# Altium PCB LGA Interposer.PcbDoc
Units mil, origin at the board's own origin, x right, y up, seen from the top; angles counter-clockwise.
Board outline 6000 x 4000 mil, 6 copper layers (Top Layer 2, Top Layer 1, Top Layer, Bottom Layer, Bottom Layer 1, Bottom Layer 2), stack 53.135 mil thick; 51 components, 307 nets, 840 pads, 0 vias.
Unrouted connection lines stored in the file: 505.
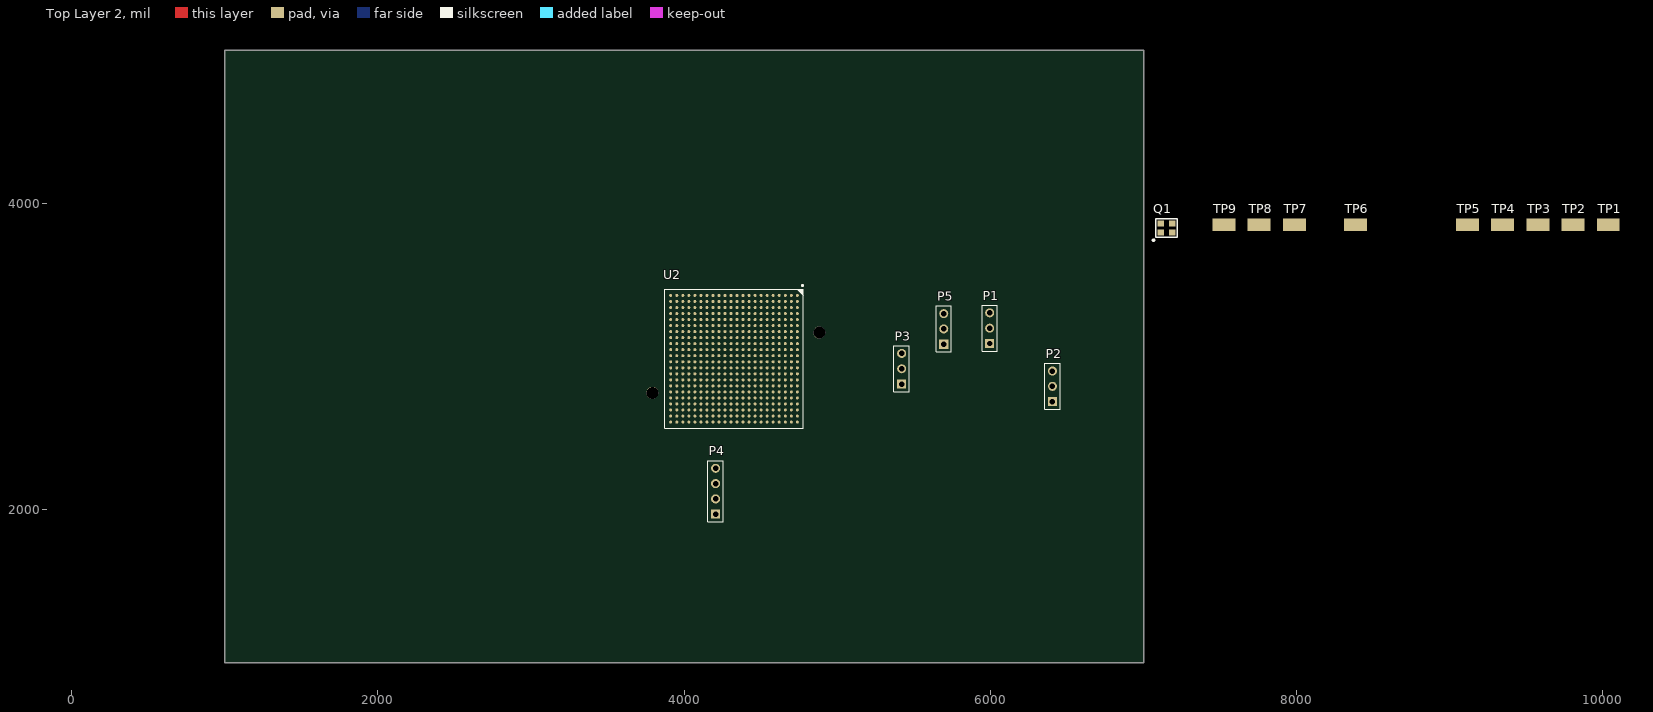
[diagram p0: Top Layer 2 view]
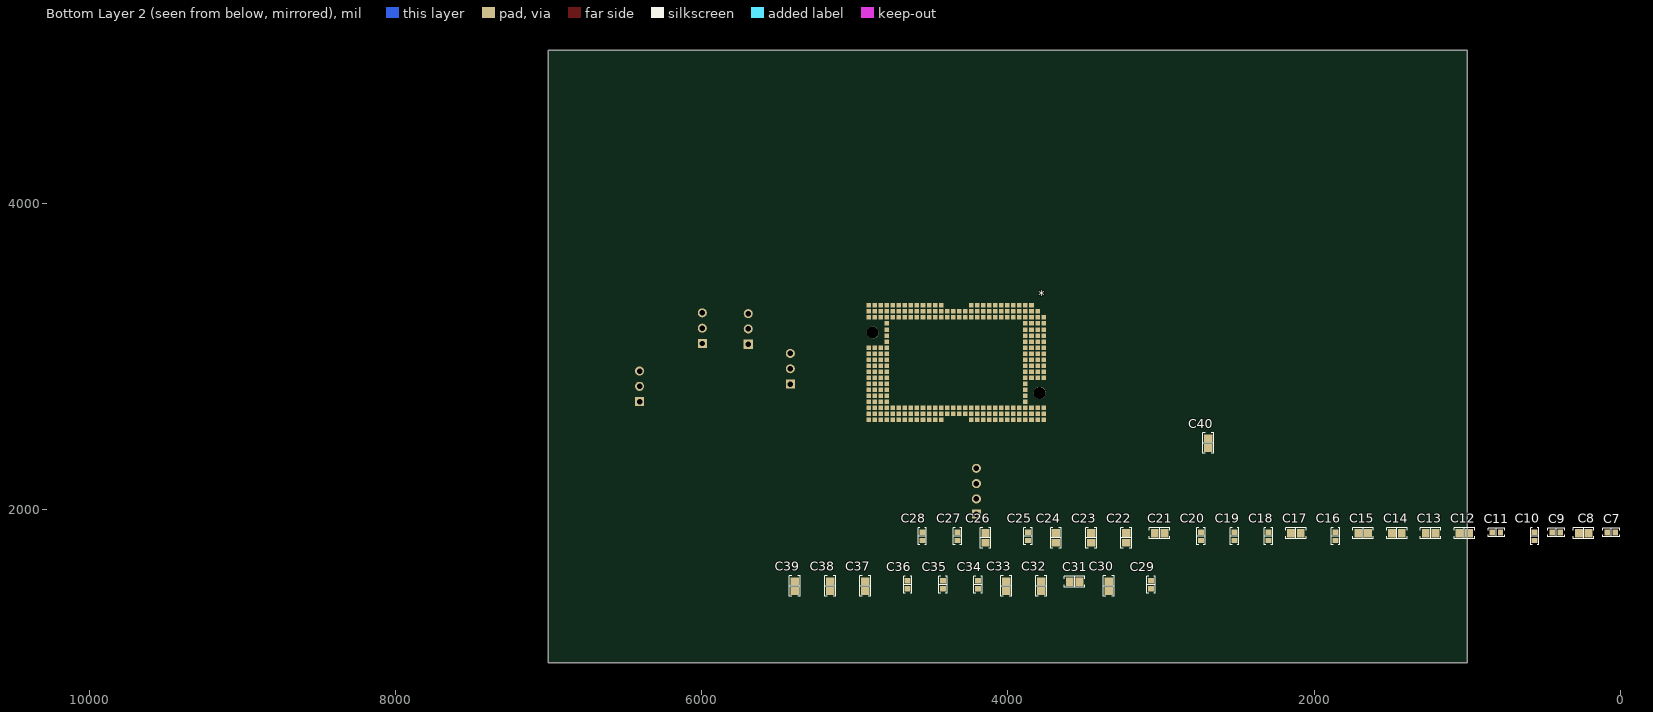
[diagram p1: Bottom Layer 2 view, seen from below]
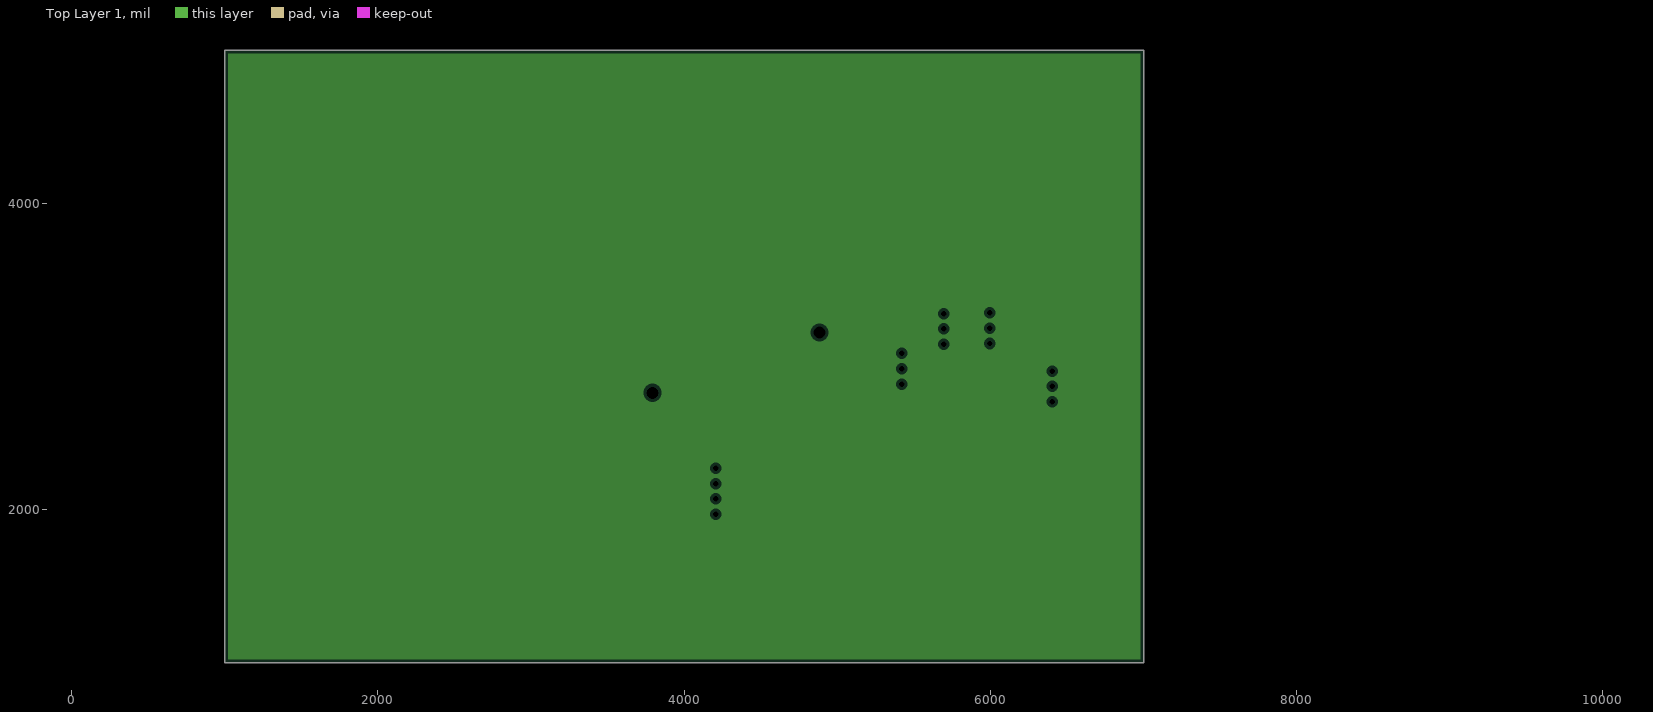
[diagram p2: Top Layer 1, clearances drawn from the general rule]
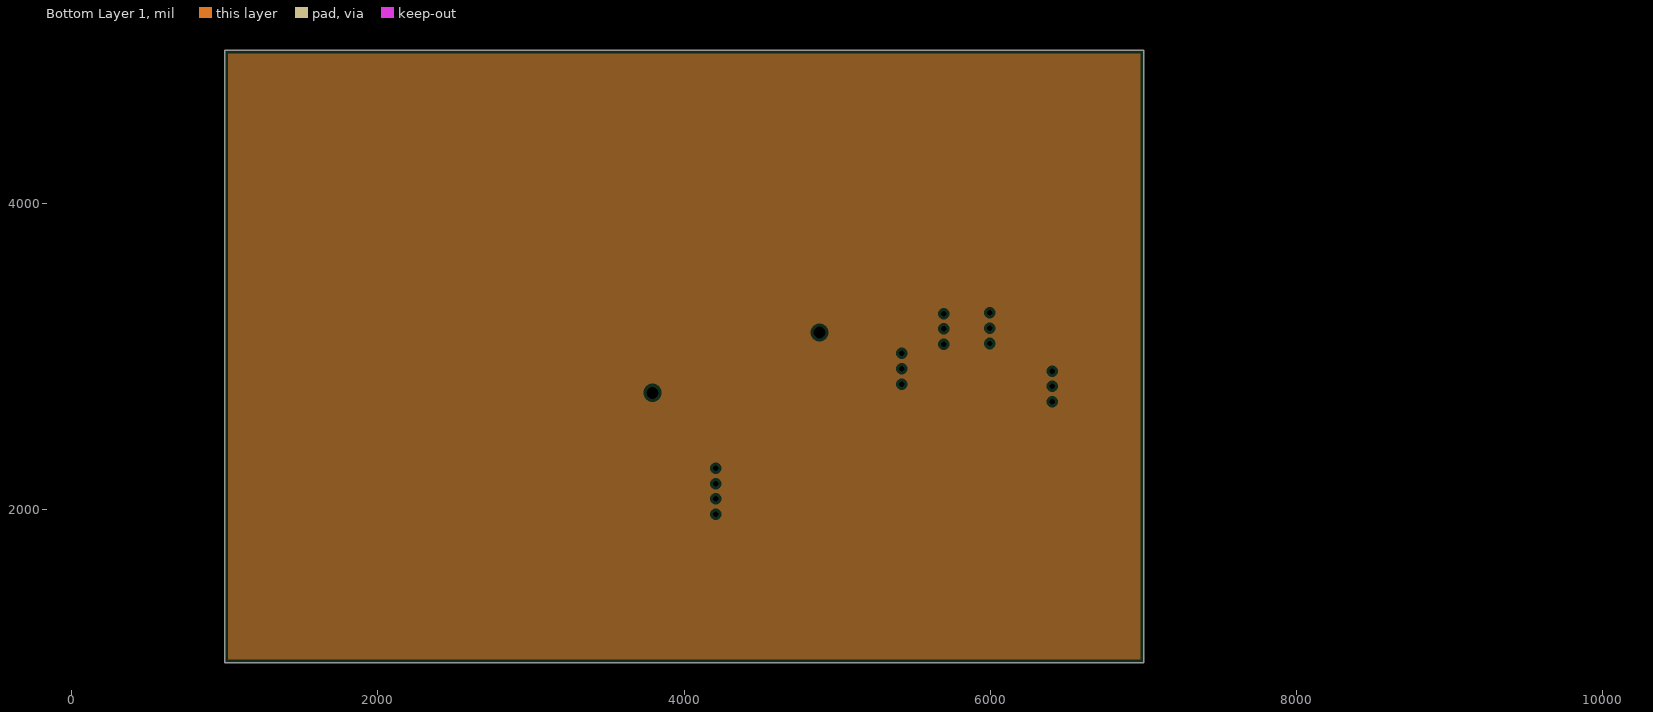
[diagram p3: Bottom Layer 1, clearances drawn from the general rule]

## Layer stack, top to bottom
Top Solder: solder mask 0.4, Solder Resist, Dk 3.5
Top Layer 2: signal copper 1.378
Dielectric 4: prepreg 3.9134, PP-006, Dk 4.1
Top Layer 1: plane copper 0.5984
Dielectric 2: core 13.7795, PP-006, Dk 4.1
Top Layer: signal copper 0.5984
Dielectric 1: dielectric 12.6, FR-4, Dk 4.8
Bottom Layer: signal copper 0.5984
Dielectric 3: core 13.7795, PP-006, Dk 4.1
Bottom Layer 1: plane copper 0.5984
Dielectric 5: prepreg 3.9134, PP-006, Dk 4.1
Bottom Layer 2: signal copper 1.378
Bottom Solder: solder mask 0.4, Solder Resist, Dk 3.5

## Board outline
1000,1000 7000,1000 7000,5000 1000,5000

## Design rules (kind name [scope] priority, off if disabled: settings)
Clearance [All] p1: gap=6 ignorepadtopadclearanceinfootprint=FALSE
DiffPairsRouting [All] p1: maxlimit=10 minlimit=10 mostfreqgap=10 toplayer_minwidth=15 toplayer_maxwidth=15 toplayer_prefwidth=15 midlayer1_minwidth=15 midlayer1_maxwidth=15 midlayer1_prefwidth=15 midlayer2_minwidth=15 midlayer2_maxwidth=15 midlayer2_prefwidth=15 bottomlayer_minwidth=15 bottomlayer_maxwidth=15 bottomlayer_prefwidth=15 maxuncoupledlength=500
PlaneClearance [All] p1: clearance=20
PlaneConnect [All] p1: planeconnectstyle=Relief reliefexpansion=20 reliefentries=4 reliefconductorwidth=10 reliefairgap=10
PolygonConnect [All] p1: connectstyle=Relief reliefconductorwidth=10 reliefentries=4 polygonreliefangle="90 Angle" airgapwidth=10
RoutingVias [All] p1: holewidth=28 width=50 viastyle="Through Hole" minholewidth=28 minwidth=50 maxholewidth=28 maxwidth=50
SolderMaskExpansion [All] p1: expansion=4 istentingtop=FALSE
Width [All] p1: maxlimit=10 minlimit=10 preferedwidth=10
27 further rules are at their usual default settings.

## Classes and differential pairs
net class GPIO[0..118]: GPIO0 GPIO1 GPIO2 GPIO3 GPIO4 GPIO5 GPIO6 GPIO7 GPIO8 GPIO9 GPIO10 GPIO11 GPIO12 GPIO13 GPIO14 GPIO15 GPIO16 GPIO17 GPIO18 GPIO19 GPIO20 GPIO21 GPIO22 GPIO23 GPIO24 GPIO25 GPIO26 GPIO27 GPIO28 GPIO29 GPIO30 GPIO31 GPIO32 GPIO33 GPIO34 GPIO35 GPIO36 GPIO37 GPIO38 GPIO39 GPIO40 GPIO41 GPIO42 GPIO43 GPIO44 GPIO45 GPIO46 GPIO47 GPIO48 GPIO49 GPIO50 GPIO51 GPIO52 GPIO53 GPIO54 GPIO55 GPIO56 GPIO57 GPIO58 GPIO59 GPIO60 GPIO61 GPIO62 GPIO63 GPIO64 GPIO65 GPIO66 GPIO67 GPIO68 GPIO69 GPIO70 GPIO71 GPIO72 GPIO73 GPIO74 GPIO75 GPIO76 GPIO77 GPIO78 GPIO79 GPIO80 GPIO81 GPIO82 GPIO83 GPIO84 GPIO85 GPIO86 GPIO87 GPIO88 GPIO89 GPIO90 GPIO91 GPIO92 GPIO93 GPIO94 GPIO95 GPIO96 GPIO97 GPIO98 GPIO99 GPIO100 GPIO101 GPIO102 GPIO103 GPIO104 GPIO105 GPIO106 GPIO107 GPIO108 GPIO109 GPIO110 GPIO111 GPIO112 GPIO113 GPIO114 GPIO115 GPIO116 GPIO117 GPIO118
net class EIO[0..35]: EIO0 EIO1 EIO2 EIO3 EIO4 EIO5 EIO6 EIO7 EIO8 EIO9 EIO10 EIO11 EIO12 EIO13 EIO14 EIO15 EIO16 EIO17 EIO18 EIO19 EIO20 EIO21 EIO22 EIO23 EIO24 EIO25 EIO26 EIO27 EIO28 EIO29 EIO30 EIO31 EIO32 EIO33 EIO34 EIO35
net class DQ[63..0]: DQ0 DQ1 DQ2 DQ3 DQ4 DQ5 DQ6 DQ7 DQ8 DQ9 DQ10 DQ11 DQ12 DQ13 DQ14 DQ15 DQ16 DQ17 DQ18 DQ19 DQ20 DQ21 DQ22 DQ23 DQ24 DQ25 DQ26 DQ27 DQ28 DQ29 DQ30 DQ31 DQ32 DQ33 DQ34 DQ35 DQ36 DQ37 DQ38 DQ39 DQ40 DQ41 DQ42 DQ43 DQ44 DQ45 DQ46 DQ47 DQ48 DQ49 DQ50 DQ51 DQ52 DQ53 DQ54 DQ55 DQ56 DQ57 DQ58 DQ59 DQ60 DQ61 DQ62 DQ63
net class DG_7: DQ56 DQ57 DQ58 DQ59 DQ60 DQ61 DQ62 DQ63 DQS7_N DQS7_P
net class DG_6: DQ48 DQ49 DQ50 DQ51 DQ52 DQ53 DQ54 DQ55 DQS6_N DQS6_P
net class DG_5: DQ40 DQ41 DQ42 DQ43 DQ44 DQ45 DQ46 DQ47 DQS5_N DQS5_P
net class DG_4: DQ32 DQ33 DQ34 DQ35 DQ36 DQ37 DQ38 DQ39 DQS4_N DQS4_P
net class DG_3: DQ24 DQ25 DQ26 DQ27 DQ28 DQ29 DQ30 DQ31 DQS3_N DQS3_P
net class DG_2: DQ16 DQ17 DQ18 DQ19 DQ20 DQ21 DQ22 DQ23 DQS2_N DQS2_P
net class DG_1: DQ8 DQ9 DQ10 DQ11 DQ12 DQ13 DQ14 DQ15 DQS1_N DQS1_P
net class DG_0: DQ0 DQ1 DQ2 DQ3 DQ4 DQ5 DQ6 DQ7 DQS0_N DQS0_P
net class CG: A0 A1 A2 A3 A4 A5 A6 A7 A8 A9 A10 A11 A12 A13 A14 A15
net class BA[2..0]: BA0 BA1 BA2
net class A[15..0]: A0 A1 A2 A3 A4 A5 A6 A7 A8 A9 A10 A11 A12 A13 A14 A15
component class Top: P1 P2 P3 P4 P5 Q1 TP1 TP2 TP3 TP4 TP5 TP6 TP7 TP8 TP9
component class "LGA Interposer": *
component class "A200T FPGA": C7 C8 C9 C10 C11 C12 C13 C14 C15 C16 C17 C18 C19 C20 C21 C22 C23 C24 C25 C26 C27 C28 C29 C30 C31 C32 C33 C34 C35 C36 C37 C38 C39 C40 U2
differential pair DQS7: +DQS7_P -DQS7_N
differential pair DQS6: +DQS6_P -DQS6_N
differential pair DQS5: +DQS5_P -DQS5_N
differential pair DQS4: +DQS4_P -DQS4_N
differential pair DQS3: +DQS3_P -DQS3_N
differential pair DQS2: +DQS2_P -DQS2_N
differential pair DQS1: +DQS1_P -DQS1_N
differential pair DQS0: +DQS0_P -DQS0_N
differential pair CK0: +CK0_P -CK0_N

## Components (designator, comment, footprint, x,y, rotation, side; value= is the part's Value field where it differs from the comment)
* "2319757-1  Socket" "2319757-1  LGA Socket" 3766.34,3333.74 r0 bottom
C7 "0.47µF" "CAP 0603_1608" 58.5,1850 r180 bottom
C8 "47µF" "CAP 0805_2012" 238.5,1845 r180 bottom
C9 "0.47µF" "CAP 0603_1608" 418.5,1850 r180 bottom
C10 "0.47µF" "CAP 0603_1608" 558.5,1825 r90 bottom
C11 "0.47µF" "CAP 0603_1608" 808.5,1850 r180 bottom
C12 "47µF" "CAP 0805_2012" 1018.5,1845 r180 bottom
C13 "47µF" "CAP 0805_2012" 1238.5,1845 r180 bottom
C14 "47µF" "CAP 0805_2012" 1458.5,1845 r180 bottom
C15 "47µF" "CAP 0805_2012" 1678.5,1845 r180 bottom
C16 "0.47µF" "CAP 0603_1608" 1858.5,1825 r90 bottom
C17 "47µF" "CAP 0805_2012" 2118.5,1845 r180 bottom
C18 "0.47µF" "CAP 0603_1608" 2298.5,1825 r90 bottom
C19 "0.47µF" "CAP 0603_1608" 2518.5,1825 r90 bottom
C20 "0.47µF" "CAP 0603_1608" 2738.5,1825 r90 bottom
C21 "47µF" "CAP 0805_2012" 3008.5,1845 r180 bottom
C22 "47µF" "CAP 0805_2012" 3225.35,1815 r90 bottom
C23 "47µF" "CAP 0805_2012" 3455.35,1815 r90 bottom
C24 "47µF" "CAP 0805_2012" 3685.35,1815 r90 bottom
C25 "0.47µF" "CAP 0603_1608" 3868.5,1825 r90 bottom
C26 "47µF" "CAP 0805_2012" 4145.35,1815 r90 bottom
C27 "0.47µF" "CAP 0603_1608" 4328.5,1825 r90 bottom
C28 "0.47µF" "CAP 0603_1608" 4558.5,1825 r90 bottom
C29 "0.47µF" "CAP 0603_1608" 3063.5,1510 r90 bottom
C30 "47µF" "CAP 0805_2012" 3340.35,1500 r90 bottom
C31 "47µF" "CAP 0805_2012" 3563.5,1530 r180 bottom
C32 "47µF" "CAP 0805_2012" 3780.35,1500 r90 bottom
C33 "47µF" "CAP 0805_2012" 4010.35,1500 r90 bottom
C34 "0.47µF" "CAP 0603_1608" 4193.5,1510 r90 bottom
C35 "0.47µF" "CAP 0603_1608" 4423.5,1510 r90 bottom
C36 "0.47µF" "CAP 0603_1608" 4653.5,1510 r90 bottom
C37 "47µF" "CAP 0805_2012" 4930.35,1500 r90 bottom
C38 "47µF" "CAP 0805_2012" 5160.35,1500 r90 bottom
C39 "47µF" "CAP 0805_2012" 5390.35,1500 r90 bottom
C40 "47µF" "CAP 0805_2012" 2690,2433.5 r90 bottom
P1 "Header 3" HDR1X3 5995,3085 r90 top
P2 "Header 3" HDR1X3 6405,2705 r90 top
P3 "Header 3" HDR1X3 5420,2820 r90 top
P4 "Header 4" HDR1X4 4205,1970 r90 top
P5 "Header 3" HDR1X3 5695,3080 r90 top
Q1 "SiT8008 Oscillator" "SiT8008 2.5x2" 7150,3840 r0 top
TP1 "5019" KSTN-5019_V 10035,3860 r0 top
TP2 "5019" KSTN-5019_V 9805,3860 r0 top
TP3 "5019" KSTN-5019_V 9575,3860 r0 top
TP4 "5019" KSTN-5019_V 9345,3860 r0 top
TP5 "5019" KSTN-5019_V 9115,3860 r0 top
TP6 "5019" KSTN-5019_V 8385,3860 r0 top
TP7 "5019" KSTN-5019_V 7985,3860 r0 top
TP8 "5019" KSTN-5019_V 7755,3860 r0 top
TP9 "5019" KSTN-5019_V 7525,3860 r0 top
U2 "XC7A200T-2FBG484I" FBG484 4325.31,2985.32 r270 top

## Footprints (in the part's own frame and the unit in brackets; to place one, negate y for a bottom-side part, rotate by r counter-clockwise, add the part's x,y. Pads: shape width x height; smd on the part's side, far side on the other; paste and mask are expansions set on the pad)
"2319757-1  LGA Socket" [mm]
  rect 0.75x0.75 smd: 1(2,0) 2(3,0) 3(4,0) 4(5,0) 5(6,0) 6(7,0) 7(8,0) 8(9,0) 9(10,0) 10(11,0) 11(12,0) 12(17,0) 13(18,0) 14(19,0) 15(20,0) 16(21,0) 17(22,0) 18(23,0) 19(24,0) 20(25,0) 21(26,0) 22(27,0) 23(28,0) 24(29,0) 25(1,1) 26(2,1) 27(3,1) 28(4,1) 29(5,1) 30(6,1) 31(7,1) 32(8,1) 33(9,1) 34(10,1) 35(11,1) 36(12,1) 37(13,1) 38(14,1) 39(15,1) 40(16,1) 41(17,1) 42(18,1) 43(19,1) 44(20,1) 45(21,1) 46(22,1) 47(23,1) 48(24,1) 49(25,1) 50(26,1) 51(27,1) 52(28,1) 53(29,1) 54(0,2) 55(1,2) 56(2,2) 57(3,2) 58(4,2) 59(5,2) 60(6,2) 61(7,2) 62(8,2) 63(9,2) 64(10,2) 65(11,2) 66(12,2) 67(13,2) 68(14,2) 69(15,2) 70(16,2) 71(17,2) 72(18,2) 73(19,2) 74(20,2) 75(21,2) 76(22,2) 77(23,2) 78(24,2) 79(25,2) 80(26,2) 81(27,2) 82(28,2) 83(29,2) 84(0,3) 85(1,3) 86(2,3) 87(3,3) 88(26,3) 89(0,4) 90(1,4) 91(2,4) 92(3,4) 93(26,4) 94(0,5) 95(1,5) 96(2,5) 97(3,5) 98(26,5) 99(0,6) 100(1,6) 101(2,6) 102(3,6) 103(26,6) 104(0,7) 105(1,7) 106(2,7) 107(3,7) 108(26,7) 109(27,7) 110(28,7) 111(29,7) 112(0,8) 113(1,8) 114(2,8) 115(3,8) 116(26,8) 117(27,8) 118(28,8) 119(29,8) 120(0,9) 121(1,9) 122(2,9) 123(3,9) 124(26,9) 125(27,9) 126(28,9) 127(29,9) 128(0,10) 129(1,10) 130(2,10) 131(3,10) 132(26,10) 133(27,10) 134(28,10) 135(29,10) 136(0,11) 137(1,11) 138(2,11) 139(3,11) 140(26,11) 141(27,11) 142(28,11) 143(29,11) 144(0,12) 145(1,12) 146(2,12) 147(3,12) 148(26,12) 149(27,12) 150(28,12) 151(29,12) 152(3,13) 153(26,13) 154(27,13) 155(28,13) 156(29,13) 157(3,14) 158(26,14) 159(27,14) 160(28,14) 161(29,14) 162(3,15) 163(26,15) 164(27,15) 165(28,15) 166(29,15) 167(3,16) 168(26,16) 169(27,16) 170(28,16) 171(29,16) 172(0,17) 173(1,17) 174(2,17) 175(3,17) 176(4,17) 177(5,17) 178(6,17) 179(7,17) 180(8,17) 181(9,17) 182(10,17) 183(11,17) 184(12,17) 185(13,17) 186(14,17) 187(15,17) 188(16,17) 189(17,17) 190(18,17) 191(19,17) 192(20,17) 193(21,17) 194(22,17) 195(23,17) 196(24,17) 197(25,17) 198(26,17) 199(27,17) 200(28,17) 201(29,17) 202(0,18) 203(1,18) 204(2,18) 205(3,18) 206(4,18) 207(5,18) 208(6,18) 209(7,18) 210(8,18) 211(9,18) 212(10,18) 213(11,18) 214(12,18) 215(13,18) 216(14,18) 217(15,18) 218(16,18) 219(17,18) 220(18,18) 221(19,18) 222(20,18) 223(21,18) 224(22,18) 225(23,18) 226(24,18) 227(25,18) 228(26,18) 229(27,18) 230(28,18) 231(29,18) 232(0,19) 233(1,19) 234(2,19) 235(3,19) 236(4,19) 237(5,19) 238(6,19) 239(7,19) 240(8,19) 241(9,19) 242(10,19) 243(11,19) 244(12,19) 245(17,19) 246(18,19) 247(19,19) 248(20,19) 249(21,19) 250(22,19) 251(23,19) 252(24,19) 253(25,19) 254(26,19) 255(27,19) 256(28,19) 257(29,19)
  round 2 hole 2 unplated: NC(0.65,14.5) NC(28.35,4.5)
"CAP 0603_1608" [mm] "Chip Capacitor, 2-Leads, Body 1.60x0.80mm, IPC Medium Density"
  rect 0.9x1 smd: 1(-0.675,0) 2(0.675,0)
  silkscreen extent -1.4,-0.7 1.4,0.7, body extent -0.8,-0.41 0.8,0.41, height 0.82
"CAP 0805_2012" [mm] "Chip Capacitor, 2-Leads, Body 2.00x1.20mm, IPC Medium Density"
  rect 1.3x1.4 smd: 1(-0.8,0) 2(0.8,0)
  silkscreen extent -1.7,-0.9 1.7,0.9, body extent -1,-0.64 1,0.64, height 1.26
FBG484 [mm] "BGA, 484-Balls, Body 23x23mm, Pitch 1.0mm"
  round 0.5 smd: A1(-10.5,10.5) A2(-9.5,10.5) A3(-8.5,10.5) A4(-7.5,10.5) A5(-6.5,10.5) A6(-5.5,10.5) A7(-4.5,10.5) A8(-3.5,10.5) A9(-2.5,10.5) A10(-1.5,10.5) A11(-0.5,10.5) A12(0.5,10.5) A13(1.5,10.5) A14(2.5,10.5) A15(3.5,10.5) A16(4.5,10.5) A17(5.5,10.5) A18(6.5,10.5) A19(7.5,10.5) A20(8.5,10.5) A21(9.5,10.5) A22(10.5,10.5) AA1(-10.5,-9.5) AA2(-9.5,-9.5) AA3(-8.5,-9.5) AA4(-7.5,-9.5) AA5(-6.5,-9.5) AA6(-5.5,-9.5) AA7(-4.5,-9.5) AA8(-3.5,-9.5) AA9(-2.5,-9.5) AA10(-1.5,-9.5) AA11(-0.5,-9.5) AA12(0.5,-9.5) AA13(1.5,-9.5) AA14(2.5,-9.5) AA15(3.5,-9.5) AA16(4.5,-9.5) AA17(5.5,-9.5) AA18(6.5,-9.5) AA19(7.5,-9.5) AA20(8.5,-9.5) AA21(9.5,-9.5) AA22(10.5,-9.5) AB1(-10.5,-10.5) AB2(-9.5,-10.5) AB3(-8.5,-10.5) AB4(-7.5,-10.5) AB5(-6.5,-10.5) AB6(-5.5,-10.5) AB7(-4.5,-10.5) AB8(-3.5,-10.5) AB9(-2.5,-10.5) AB10(-1.5,-10.5) AB11(-0.5,-10.5) AB12(0.5,-10.5) AB13(1.5,-10.5) AB14(2.5,-10.5) AB15(3.5,-10.5) AB16(4.5,-10.5) AB17(5.5,-10.5) AB18(6.5,-10.5) AB19(7.5,-10.5) AB20(8.5,-10.5) AB21(9.5,-10.5) AB22(10.5,-10.5) B1(-10.5,9.5) B2(-9.5,9.5) B3(-8.5,9.5) B4(-7.5,9.5) B5(-6.5,9.5) B6(-5.5,9.5) B7(-4.5,9.5) B8(-3.5,9.5) B9(-2.5,9.5) B10(-1.5,9.5) B11(-0.5,9.5) B12(0.5,9.5) B13(1.5,9.5) B14(2.5,9.5) B15(3.5,9.5) B16(4.5,9.5) B17(5.5,9.5) B18(6.5,9.5) B19(7.5,9.5) B20(8.5,9.5) B21(9.5,9.5) B22(10.5,9.5) C1(-10.5,8.5) C2(-9.5,8.5) C3(-8.5,8.5) C4(-7.5,8.5) C5(-6.5,8.5) C6(-5.5,8.5) C7(-4.5,8.5) C8(-3.5,8.5) C9(-2.5,8.5) C10(-1.5,8.5) C11(-0.5,8.5) C12(0.5,8.5) C13(1.5,8.5) C14(2.5,8.5) C15(3.5,8.5) C16(4.5,8.5) C17(5.5,8.5) C18(6.5,8.5) C19(7.5,8.5) C20(8.5,8.5) C21(9.5,8.5) C22(10.5,8.5) D1(-10.5,7.5) D2(-9.5,7.5) D3(-8.5,7.5) D4(-7.5,7.5) D5(-6.5,7.5) D6(-5.5,7.5) D7(-4.5,7.5) D8(-3.5,7.5) D9(-2.5,7.5) D10(-1.5,7.5) D11(-0.5,7.5) D12(0.5,7.5) D13(1.5,7.5) D14(2.5,7.5) D15(3.5,7.5) D16(4.5,7.5) D17(5.5,7.5) D18(6.5,7.5) D19(7.5,7.5) D20(8.5,7.5) D21(9.5,7.5) D22(10.5,7.5) E1(-10.5,6.5) E2(-9.5,6.5) E3(-8.5,6.5) E4(-7.5,6.5) E5(-6.5,6.5) E6(-5.5,6.5) E7(-4.5,6.5) E8(-3.5,6.5) E9(-2.5,6.5) E10(-1.5,6.5) E11(-0.5,6.5) E12(0.5,6.5) E13(1.5,6.5) E14(2.5,6.5) E15(3.5,6.5) E16(4.5,6.5) E17(5.5,6.5) E18(6.5,6.5) E19(7.5,6.5) E20(8.5,6.5) E21(9.5,6.5) E22(10.5,6.5) F1(-10.5,5.5) F2(-9.5,5.5) F3(-8.5,5.5) F4(-7.5,5.5) F5(-6.5,5.5) F6(-5.5,5.5) F7(-4.5,5.5) F8(-3.5,5.5) F9(-2.5,5.5) F10(-1.5,5.5) F11(-0.5,5.5) F12(0.5,5.5) F13(1.5,5.5) F14(2.5,5.5) F15(3.5,5.5) F16(4.5,5.5) F17(5.5,5.5) F18(6.5,5.5) F19(7.5,5.5) F20(8.5,5.5) F21(9.5,5.5) F22(10.5,5.5) G1(-10.5,4.5) G2(-9.5,4.5) G3(-8.5,4.5) G4(-7.5,4.5) G5(-6.5,4.5) G6(-5.5,4.5) G7(-4.5,4.5) G8(-3.5,4.5) G9(-2.5,4.5) G10(-1.5,4.5) G11(-0.5,4.5) G12(0.5,4.5) G13(1.5,4.5) G14(2.5,4.5) G15(3.5,4.5) G16(4.5,4.5) G17(5.5,4.5) G18(6.5,4.5) G19(7.5,4.5) G20(8.5,4.5) G21(9.5,4.5) G22(10.5,4.5) H1(-10.5,3.5) H2(-9.5,3.5) H3(-8.5,3.5) H4(-7.5,3.5) H5(-6.5,3.5) H6(-5.5,3.5) H7(-4.5,3.5) H8(-3.5,3.5) H9(-2.5,3.5) H10(-1.5,3.5) H11(-0.5,3.5) H12(0.5,3.5) H13(1.5,3.5) H14(2.5,3.5) H15(3.5,3.5) H16(4.5,3.5) H17(5.5,3.5) H18(6.5,3.5) H19(7.5,3.5) H20(8.5,3.5) H21(9.5,3.5) H22(10.5,3.5) J1(-10.5,2.5) J2(-9.5,2.5) J3(-8.5,2.5) J4(-7.5,2.5) J5(-6.5,2.5) J6(-5.5,2.5) J7(-4.5,2.5) J8(-3.5,2.5) J9(-2.5,2.5) J10(-1.5,2.5) J11(-0.5,2.5) J12(0.5,2.5) J13(1.5,2.5) J14(2.5,2.5) J15(3.5,2.5) J16(4.5,2.5) J17(5.5,2.5) J18(6.5,2.5) J19(7.5,2.5) J20(8.5,2.5) J21(9.5,2.5) J22(10.5,2.5) K1(-10.5,1.5) K2(-9.5,1.5) K3(-8.5,1.5) K4(-7.5,1.5) K5(-6.5,1.5) K6(-5.5,1.5) K7(-4.5,1.5) K8(-3.5,1.5) K9(-2.5,1.5) K10(-1.5,1.5) K11(-0.5,1.5) K12(0.5,1.5) K13(1.5,1.5) K14(2.5,1.5) K15(3.5,1.5) K16(4.5,1.5) K17(5.5,1.5) K18(6.5,1.5) K19(7.5,1.5) K20(8.5,1.5) K21(9.5,1.5) K22(10.5,1.5) L1(-10.5,0.5) L2(-9.5,0.5) L3(-8.5,0.5) L4(-7.5,0.5) L5(-6.5,0.5) L6(-5.5,0.5) L7(-4.5,0.5) L8(-3.5,0.5) L9(-2.5,0.5) L10(-1.5,0.5) L11(-0.5,0.5) L12(0.5,0.5) L13(1.5,0.5) L14(2.5,0.5) L15(3.5,0.5) L16(4.5,0.5) L17(5.5,0.5) L18(6.5,0.5) L19(7.5,0.5) L20(8.5,0.5) L21(9.5,0.5) L22(10.5,0.5) M1(-10.5,-0.5) M2(-9.5,-0.5) M3(-8.5,-0.5) M4(-7.5,-0.5) M5(-6.5,-0.5) M6(-5.5,-0.5) M7(-4.5,-0.5) M8(-3.5,-0.5) M9(-2.5,-0.5) M10(-1.5,-0.5) M11(-0.5,-0.5) M12(0.5,-0.5) M13(1.5,-0.5) M14(2.5,-0.5) M15(3.5,-0.5) M16(4.5,-0.5) M17(5.5,-0.5) M18(6.5,-0.5) M19(7.5,-0.5) M20(8.5,-0.5) M21(9.5,-0.5) M22(10.5,-0.5) N1(-10.5,-1.5) N2(-9.5,-1.5) N3(-8.5,-1.5) N4(-7.5,-1.5) N5(-6.5,-1.5) N6(-5.5,-1.5) N7(-4.5,-1.5) N8(-3.5,-1.5) N9(-2.5,-1.5) N10(-1.5,-1.5) N11(-0.5,-1.5) N12(0.5,-1.5) N13(1.5,-1.5) N14(2.5,-1.5) N15(3.5,-1.5) N16(4.5,-1.5) N17(5.5,-1.5) N18(6.5,-1.5) N19(7.5,-1.5) N20(8.5,-1.5) N21(9.5,-1.5) N22(10.5,-1.5) P1(-10.5,-2.5) P2(-9.5,-2.5) P3(-8.5,-2.5) P4(-7.5,-2.5) P5(-6.5,-2.5) P6(-5.5,-2.5) P7(-4.5,-2.5) P8(-3.5,-2.5) P9(-2.5,-2.5) P10(-1.5,-2.5) P11(-0.5,-2.5) P12(0.5,-2.5) P13(1.5,-2.5) P14(2.5,-2.5) P15(3.5,-2.5) P16(4.5,-2.5) P17(5.5,-2.5) P18(6.5,-2.5) P19(7.5,-2.5) P20(8.5,-2.5) P21(9.5,-2.5) P22(10.5,-2.5) R1(-10.5,-3.5) R2(-9.5,-3.5) R3(-8.5,-3.5) R4(-7.5,-3.5) R5(-6.5,-3.5) R6(-5.5,-3.5) R7(-4.5,-3.5) R8(-3.5,-3.5) R9(-2.5,-3.5) R10(-1.5,-3.5) R11(-0.5,-3.5) R12(0.5,-3.5) R13(1.5,-3.5) R14(2.5,-3.5) R15(3.5,-3.5) R16(4.5,-3.5) R17(5.5,-3.5) R18(6.5,-3.5) R19(7.5,-3.5) R20(8.5,-3.5) R21(9.5,-3.5) R22(10.5,-3.5) T1(-10.5,-4.5) T2(-9.5,-4.5) T3(-8.5,-4.5) T4(-7.5,-4.5) T5(-6.5,-4.5) T6(-5.5,-4.5) T7(-4.5,-4.5) T8(-3.5,-4.5) T9(-2.5,-4.5) T10(-1.5,-4.5) T11(-0.5,-4.5) T12(0.5,-4.5) T13(1.5,-4.5) T14(2.5,-4.5) T15(3.5,-4.5) T16(4.5,-4.5) T17(5.5,-4.5) T18(6.5,-4.5) T19(7.5,-4.5) T20(8.5,-4.5) T21(9.5,-4.5) T22(10.5,-4.5) U1(-10.5,-5.5) U2(-9.5,-5.5) U3(-8.5,-5.5) U4(-7.5,-5.5) U5(-6.5,-5.5) U6(-5.5,-5.5) U7(-4.5,-5.5) U8(-3.5,-5.5) U9(-2.5,-5.5) U10(-1.5,-5.5) U11(-0.5,-5.5) U12(0.5,-5.5) U13(1.5,-5.5) U14(2.5,-5.5) U15(3.5,-5.5) U16(4.5,-5.5) U17(5.5,-5.5) U18(6.5,-5.5) U19(7.5,-5.5) U20(8.5,-5.5) U21(9.5,-5.5) U22(10.5,-5.5) V1(-10.5,-6.5) V2(-9.5,-6.5) V3(-8.5,-6.5) V4(-7.5,-6.5) V5(-6.5,-6.5) V6(-5.5,-6.5) V7(-4.5,-6.5) V8(-3.5,-6.5) V9(-2.5,-6.5) V10(-1.5,-6.5) V11(-0.5,-6.5) V12(0.5,-6.5) V13(1.5,-6.5) V14(2.5,-6.5) V15(3.5,-6.5) V16(4.5,-6.5) V17(5.5,-6.5) V18(6.5,-6.5) V19(7.5,-6.5) V20(8.5,-6.5) V21(9.5,-6.5) V22(10.5,-6.5) W1(-10.5,-7.5) W2(-9.5,-7.5) W3(-8.5,-7.5) W4(-7.5,-7.5) W5(-6.5,-7.5) W6(-5.5,-7.5) W7(-4.5,-7.5) W8(-3.5,-7.5) W9(-2.5,-7.5) W10(-1.5,-7.5) W11(-0.5,-7.5) W12(0.5,-7.5) W13(1.5,-7.5) W14(2.5,-7.5) W15(3.5,-7.5) W16(4.5,-7.5) W17(5.5,-7.5) W18(6.5,-7.5) W19(7.5,-7.5) W20(8.5,-7.5) W21(9.5,-7.5) W22(10.5,-7.5) Y1(-10.5,-8.5) Y2(-9.5,-8.5) Y3(-8.5,-8.5) Y4(-7.5,-8.5) Y5(-6.5,-8.5) Y6(-5.5,-8.5) Y7(-4.5,-8.5) Y8(-3.5,-8.5) Y9(-2.5,-8.5) Y10(-1.5,-8.5) Y11(-0.5,-8.5) Y12(0.5,-8.5) Y13(1.5,-8.5) Y14(2.5,-8.5) Y15(3.5,-8.5) Y16(4.5,-8.5) Y17(5.5,-8.5) Y18(6.5,-8.5) Y19(7.5,-8.5) Y20(8.5,-8.5) Y21(9.5,-8.5) Y22(10.5,-8.5)
  silkscreen extent -12.27,-11.5 11.5,11.5, body extent -11.5,-11.5 11.5,11.5, height 2.54
HDR1X3 [mm] "Connector; Header; 3 Position"
  rect 1.5x1.5 hole 0.9: 1(0,0)
  round 1.5 hole 0.9: 2(2.54,0) 3(5.08,0)
  silkscreen extent -1.27,-1.27 6.35,1.27
HDR1X4 [mm] "Connector; Header; 4 Position"
  rect 1.5x1.5 hole 0.9: 1(0,0)
  round 1.5 hole 0.9: 2(2.54,0) 3(5.08,0) 4(7.62,0)
  silkscreen extent -1.27,-1.27 8.89,1.27
KSTN-5019_V [mm] "Test Point, 1-Leads, Body 3.81x2.03mm"
  rect 3.8x2.03 smd: 1(0,0)
  body extent -1.9,-1.01 1.9,1.02, height 2.29
"SiT8008 2.5x2" [mm]
  rect 1.1x1 smd: 1(-0.95,-0.75) 2(0.95,-0.75) 3(0.95,0.75) 4(-0.95,0.75)
  silkscreen extent -2.34,-2.21 1.78,1.52

## Part data
C7 C9 C10 C11 C16 C18 C19 C20 C25 C27 C28 C29 C34 C35 C36: library part 885012106015, "CAP CER 0.47UF 16V X5R 0603", Device Package="0603 (1608 Metric)", Manufacturer="Würth Elektronik", Operating Temperature="-55°C ~ 85°C", Supplier Part Number 1=732-7912-1-ND, Temperature Coefficient=X5R, Tolerance=±20%, Voltage - Rated=16V, Applications="General Purpose", Capacitance=0.47µF, ComponentLink1Description=Datasheet, ComponentLink1URL=https://katalog.we-online.de/pbs/datasheet/885012106015.pdf, ComponentLink2Description="DigiKey Link", ComponentLink2URL=http://digikey.com/product-detail/en/w-rth-elektronik/885012106015/732-7912-1-ND/5454539, LastUpdated="2020-09-02 1:03:18 AM", Lifecycle Status=Active, Minimum Order=1, Mounting Type="Surface Mount, MLCC", Package / Case="0603 (1608 Metric)", Packaging=TapeAndReel, Part Number=885012106015, Part Status=Active, PartId=11963, Price=0.04, Series=WCAP-CSGP, Size / Dimension="0.063\" L x 0.031\" W (1.60mm x 0.80mm)", Supplier 1=DigiKey, Thickness (Max)="0.037\" (0.95mm)"
C8 C12 C13 C14 C15 C17 C21 C22 C23 C24 C26 C30 C31 C32 C33 C37 C38 C39 C40: library part GRM21BR61A476ME15L, "CAP CER 47UF 10V X5R 0805", Device Package="0805 (2012 Metric)", Manufacturer="Murata Electronics", Operating Temperature="-55°C ~ 85°C", Supplier Part Number 1=490-9961-1-ND, Temperature Coefficient=X5R, Tolerance=±20%, Voltage - Rated=10V, Applications="General Purpose", Capacitance=47µF, ComponentLink1Description=Datasheet, ComponentLink1URL=https://search.murata.co.jp/Ceramy/image/img/A01X/G101/ENG/GRM21BR61A476ME15-01.pdf, ComponentLink2Description="DigiKey Link", ComponentLink2URL=http://digikey.com/product-detail/en/murata-electronics/GRM21BR61A476ME15L/490-9961-1-ND/5026442, LastUpdated="2020-09-02 1:04:38 AM", Lifecycle Status=Active, Minimum Order=1, Mounting Type="Surface Mount, MLCC", Package / Case="0805 (2012 Metric)", Packaging=TapeAndReel, Part Number=GRM21BR61A476ME15L, Part Status=Active, PartId=4627, Price=0.19, Series=GRM, Size / Dimension="0.079\" L x 0.049\" W (2.00mm x 1.25mm)", Supplier 1=DigiKey, Thickness (Max)="0.057\" (1.45mm)"
P1 P2 P3 P5: "Header, 3-Pin", LatestRevisionDate=17-Jul-2002, LatestRevisionNote="Re-released for DXP Platform.", Publisher="Altium Limited"
P4: "Header, 4-Pin", LatestRevisionDate=17-Jul-2002, LatestRevisionNote="Re-released for DXP Platform.", Publisher="Altium Limited"
TP1 TP2 TP3 TP4 TP5 TP6 TP7 TP8 TP9: library part CMP-1672-00008-1, "Test Point, 1 Position SMD, RoHS, Tape and Reel", Package Quantity=1000, ComponentLink1Description="Manufacturer URL", ComponentLink1URL=http://www.keyelco.com/, ComponentLink2Description=Datasheet, ComponentLink2URL=http://www.keyelco.com/product-pdf.cfm?p=1357, Contact Plating=Silver, DatasheetVersion=03/2014, Mount="Surface Mount", Mounting Technology="Surface Mount", PackageDescription="1-Pin Surface Mount Device, Body 3.81 x 2.03 mm", PackageReference=5019, Packaging="Tape and Reel", Pins=1, RoHSCompliant=True
U2: "Artix-7 FPGA, 285 User I/Os, 4 GTP, 484-Ball BGA, Speed Grade 2, Industrial Grade, Pb-Free", Generic Part Number=XC7A200T, Manufacturer=Xilinx, Supplier Part Number 1=122-1866-ND, Block RAM Blocks (18Kb)=730, Block RAM Blocks (36Kb)=365, Block RAM Blocks (Max Kb)=13140, CLBs (Max Distributed RAM Kb)=2888, CLBs (Slices)=33650, Clock Mgmt Tiles (CMTs)=10, Code_JEDEC=MS-034, ComponentLink1Description="Manufacturer URL", ComponentLink1URL=http://www.xilinx.com/, ComponentLink2Description=Datasheet, ComponentLink2URL=http://www.xilinx.com/support/documentation/data_sheets/ds180_7Series_Overview.pdf, ComponentLink3Description="Package Specification", ComponentLink3URL=http://www.xilinx.com/support/documentation/user_guides/ug475_7Series_Pkg_Pinout.pdf, ComponentLink4Description="DC and Switching Characteristics", ComponentLink4URL=http://www.xilinx.com/support/documentation/data_sheets/ds181_Artix_7_Data_Sheet.pdf, ComponentLink5Description="Package File", ComponentLink5URL=http://www.xilinx.com/support/packagefiles/a7packages/xc7a200tfbg484pkg.txt, ComponentLink6Description="Packaging and Pinout", ComponentLink6URL=http://www.xilinx.com/support/documentation/user_guides/ug475_7Series_Pkg_Pinout.pdf, DatasheetVersion=v1.12, DSP48E1 Slices=740, Logic Cells=215360, Max User I/O=500, Mounting Technology="Surface Mount", NexusDeviceID=XC7A200T-2FBG484I, PackageDescription="Flip-Chip Lidless BGA, Body 23 x 23 mm, 1.0 mm Pitch", PackageReference=FBG484, PackageVersion="Rev 1.8", PartNumber=XC7A200T-2FBG484I, RoHS=Pb-Free, Speed Grade=-2, Supplier 1=Digi-Key

## Nets (pads, with @x,y where several pads share a name; then routed paths per layer and width w, separated by ;. In a path a pad name is that pad's centre, name@x,y a point inside that pad or via, vN(x,y) a via of type N, cw(c..) or ccw(c..) an arc to the next point about the centre after c; other vN are vias at no path point)
A0: *.147 U2.K22
A1: *.145 U2.K21
A2: *.144 U2.G20
A3: *.139 U2.H20
A4: *.137 U2.H22
A5: *.136 U2.J22
A6: *.131 U2.H18
A7: *.129 U2.H17
A8: *.128 U2.H15
A9: *.123 U2.J15
A10: *.121 U2.G18
A11: *.120 U2.G17
A12: *.115 U2.G16
A13: *.114 U2.G15
A14: *.113 U2.G13
A15: *.112 U2.H13
ALE: U2.Y16
BA0: *.203 U2.J20
BA1: *.204 U2.L21
BA2: *.205 U2.M21
Busy: U2.AB17
CAS: *.175 U2.J19
CCLK: *.127 U2.L12
CE: U2.AB13
CFGBVS: *.103 U2.U8
CK0_N: *.178 U2.H14
CK0_P: *.177 U2.J14
CKE0: *.206 U2.M22
CLE: U2.Y17
CLK0: P5.2 Q1.3 U2.T5
CS0: *.207 U2.N22
D2: *.108 U2.P21
D3: *.116 U2.R21
DONE: *.88 U2.G11
DQ0: *.200 U2.F13
DQ1: *.199 U2.F14
DQ2: *.198 U2.F16
DQ3: *.197 U2.E17
DQ4: *.194 U2.E13
DQ5: *.193 U2.E14
DQ6: *.192 U2.E16
DQ7: *.191 U2.D16
DQ8: *.189 U2.B15
DQ9: *.188 U2.B16
DQ10: *.187 U2.C13
DQ11: *.186 U2.B13
DQ12: *.183 U2.A13
DQ13: *.182 U2.A14
DQ14: *.181 U2.B17
DQ15: *.180 U2.B18
DQ16: *.171 U2.E19
DQ17: *.170 U2.D19
DQ18: *.169 U2.B20
DQ19: *.168 U2.A20
DQ20: *.161 U2.A18
DQ21: *.160 U2.A19
DQ22: *.159 U2.F19
DQ23: *.158 U2.F20
DQ24: *.230 U2.D20
DQ25: *.229 U2.C20
DQ26: *.228 U2.C22
DQ27: *.227 U2.B22
DQ28: *.224 U2.E22
DQ29: *.223 U2.D22
DQ30: *.222 U2.E21
DQ31: *.221 U2.D21
DQ32: *.219 U2.K13
DQ33: *.218 U2.K14
DQ34: *.217 U2.M13
DQ35: *.216 U2.L13
DQ36: *.213 U2.L14
DQ37: *.212 U2.L15
DQ38: *.211 U2.L16
DQ39: *.210 U2.K16
DQ40: *.156 U2.W21
DQ41: *.155 U2.W22
DQ42: *.154 U2.AA20
DQ43: *.153 U2.AA21
DQ44: *.143 U2.AB21
DQ45: *.142 U2.AB22
DQ46: *.141 U2.U20
DQ47: *.140 U2.V20
DQ48: *.256 U2.V18
DQ49: *.255 U2.V19
DQ50: *.254 U2.V17
DQ51: *.253 U2.W17
DQ52: *.250 U2.AA18
DQ53: *.249 U2.AB18
DQ54: *.248 U2.U17
DQ55: *.247 U2.U18
DQ56: *.242 U2.P14
DQ57: *.241 U2.R14
DQ58: *.240 U2.R18
DQ59: *.239 U2.T18
DQ60: *.236 U2.P15
DQ61: *.235 U2.R16
DQ62: *.234 U2.N13
DQ63: *.233 U2.N14
DQS0_N: *.196 U2.C15
DQS0_P: *.195 U2.C14
DQS1_N: *.185 U2.A16
DQS1_P: *.184 U2.A15
DQS2_N: *.165 U2.E18
DQS2_P: *.164 U2.F18
DQS3_N: *.226 U2.A21
DQS3_P: *.225 U2.B21
DQS4_N: *.215 U2.J17
DQS4_P: *.214 U2.K17
DQS5_N: *.150 U2.Y22
DQS5_P: *.149 U2.Y21
DQS6_N: *.252 U2.AB20
DQS6_P: *.251 U2.AA19
DQS7_N: *.238 U2.P17
DQS7_P: *.237 U2.N17
DXN: *.110 U2.N9
DXP: *.111 U2.N10
EIO0: *.10 U2.J16
EIO1: *.9 U2.K18
EIO2: *.8 U2.K19
EIO3: *.7 U2.L19
EIO4: *.5 U2.L20
EIO5: *.4 U2.L18
EIO6: *.3 U2.N18
EIO7: *.2 U2.N19
EIO8: *.87 U2.N20
EIO9: *.85 U2.M20
EIO10: *.84 U2.M15
EIO11: *.92 U2.M16
EIO12: *.90 U2.M17
EIO13: *.89 U2.F15
EIO14: *.97 U2.D15
EIO15: *.95 U2.D17
EIO16: *.94 U2.C17
EIO17: *.102 U2.C18
EIO18: U2.C19
EIO19: U2.G21
EIO20: U2.G22
EIO21: U2.F21
EIO22: U2.P20
EIO23: U2.V22
EIO24: U2.T21
EIO25: U2.U21
EIO26: U2.P19
EIO27: U2.R19
EIO28: U2.T20
EIO29: U2.W19
EIO30: U2.W20
EIO31: U2.Y18
EIO32: U2.Y19
EIO33: U2.P16
EIO34: U2.R17
EIO35: U2.N15
FCS: *.124 U2.T19
GPIO0: *.52 U2.T3
GPIO1: *.51 U2.T1
GPIO2: *.50 U2.U1
GPIO3: *.49 U2.U2
GPIO4: *.47 U2.V2
GPIO5: *.46 U2.R3
GPIO6: *.45 U2.R2
GPIO7: *.44 U2.W2
GPIO8: *.42 U2.Y2
GPIO9: *.41 U2.W1
GPIO10: *.40 U2.Y1
GPIO11: *.39 U2.U3
GPIO12: *.37 U2.V3
GPIO13: *.36 U2.AA1
GPIO14: *.35 U2.AB1
GPIO15: *.34 U2.AB3
GPIO16: *.32 U2.AB2
GPIO17: *.31 U2.Y3
GPIO18: *.30 U2.AA3
GPIO19: *.29 U2.AA5
GPIO20: *.27 U2.AB5
GPIO21: *.26 U2.Y4
GPIO22: *.82 U2.AA4
GPIO23: *.81 U2.V4
GPIO24: *.80 U2.W4
GPIO25: *.79 U2.R4
GPIO26: *.77 U2.T4
GPIO27: *.76 U2.U5
GPIO28: *.75 U2.W6
GPIO29: *.74 U2.W5
GPIO30: U2.U6
GPIO31: U2.V5
GPIO32: U2.R6
GPIO33: U2.T6
GPIO34: U2.Y6
GPIO35: U2.AA6
GPIO36: U2.V7
GPIO37: U2.W7
GPIO38: U2.AB7
GPIO39: U2.AB6
GPIO40: U2.V9
GPIO41: U2.V8
GPIO42: U2.AA8
GPIO43: U2.AB8
GPIO44: U2.Y8
GPIO45: U2.Y7
GPIO46: U2.W9
GPIO47: U2.Y9
GPIO48: U2.U7
GPIO49: U2.F4
GPIO50: U2.B1
GPIO51: U2.A1
GPIO52: U2.C2
GPIO53: U2.B2
GPIO54: U2.E1
GPIO55: U2.D1
GPIO56: U2.E2
GPIO57: U2.D2
GPIO58: U2.G1
GPIO59: U2.F1
GPIO60: *.72 U2.F3
GPIO61: *.71 U2.E3
GPIO62: *.70 U2.K1
GPIO63: *.69 U2.J1
GPIO64: *.67 U2.H2
GPIO65: *.66 U2.G2
GPIO66: *.65 U2.K2
GPIO67: *.64 U2.J2
GPIO68: *.62 U2.J5
GPIO69: *.61 U2.H5
GPIO70: *.60 U2.H3
GPIO71: *.59 U2.G3
GPIO72: *.57 U2.H4
GPIO73: *.56 U2.G4
GPIO74: *.55 U2.K4
GPIO75: *.100 U2.J4
GPIO76: *.99 U2.L3
GPIO77: *.107 U2.K3
GPIO78: *.105 U2.M1
GPIO79: *.104 U2.L1
GPIO80: *.135 U2.M3
GPIO81: U2.M2
GPIO82: U2.K6
GPIO83: U2.J6
GPIO84: U2.L5
GPIO85: U2.L4
GPIO86: U2.N4
GPIO87: U2.N3
GPIO88: U2.R1
GPIO89: U2.P1
GPIO90: U2.P5
GPIO91: U2.P4
GPIO92: U2.P2
GPIO93: U2.N2
GPIO94: U2.M6
GPIO95: U2.M5
GPIO96: U2.P6
GPIO97: U2.N5
GPIO98: U2.L6
GPIO99: U2.AA9
GPIO100: U2.AB10
GPIO101: U2.AA10
GPIO102: U2.AA11
GPIO103: U2.V10
GPIO104: U2.W10
GPIO105: U2.Y11
GPIO106: U2.Y12
GPIO107: U2.W11
GPIO108: U2.W12
GPIO109: U2.V13
GPIO110: U2.V14
GPIO111: U2.U15
GPIO112: U2.V15
GPIO113: U2.T14
GPIO114: U2.T15
GPIO115: U2.W15
GPIO116: U2.W16
GPIO117: U2.T16
GPIO118: U2.U16
INIT: *.93 U2.U12
IO0: U2.AB12
IO1: U2.AB11
IO2: U2.Y14
IO3: U2.W14
IO4: U2.AA14
IO5: U2.Y13
IO6: U2.AB15
IO7: U2.AA15
M0: *.152 P3.2 U2.U11
M1: *.157 P2.2 U2.U10
M2: *.162 P1.2 U2.U9
MISO: *.118 U2.R22
MOSI: *.119 U2.P22
ODT0: *.208 U2.M18
PROGRAM: *.98 U2.N12
PUDC: *.126 U2.U22
RAS: *.176 U2.J21
RE: U2.AA13
RESET: *.173 U2.D14
TCK: P4.2 U2.V12
TDI: P4.3 U2.R13
TDO: P4.1 U2.U13
TMS: P4.4 U2.T13
Vccadc: *.18 *.22 C16.2 C17.2 C18.2 C19.2 C20.2 C21.2 C22.2 C23.2 C24.2 TP9.1 U2.H12 U2.K10 U2.K12 U2.M12 U2.P12 U2.R11
Vccbat: *.1 *.6 *.11 *.13 *.15 *.17 *.19 *.24 *.25 *.28 *.33 *.38 *.43 *.48 *.53 *.54 *.58 *.63 *.68 *.73 *.78 *.83 *.86 *.91 *.96 *.101 *.106 *.109 *.117 *.122 *.125 *.130 *.134 *.138 *.146 *.148 *.151 *.163 *.166 *.167 *.172 *.179 *.190 *.201 *.202 *.209 *.220 *.231 *.232 *.243 *.244 *.245 *.246 *.257 C7.1 C8.1 C9.1 C10.1 C11.1 C12.1 C13.1 C14.1 C15.1 C16.1 C17.1 C18.1 C19.1 C20.1 C21.1 C22.1 C23.1 C24.1 C25.1 C26.1 C27.1 C28.1 C29.1 C30.1 C31.1 C32.1 C33.1 C34.1 C35.1 C36.1 C37.1 C38.1 C39.1 C40.1 P1.3 P2.3 P3.3 Q1.2 TP1.1 U2.A2 U2.A3 U2.A5 U2.A7 U2.A9 U2.A11 U2.A12 U2.A22 U2.AA2 U2.AA12 U2.AA22 U2.AB9 U2.AB19 U2.B3 U2.B12 U2.B19 U2.C3 U2.C6 U2.C10 U2.C12 U2.C16 U2.D3 U2.D4 U2.D8 U2.D12 U2.D13 U2.E4 U2.E5 U2.E7 U2.E9 U2.E11 U2.E12 U2.E20 U2.F5 U2.F11 U2.F17 U2.G5 U2.G6 U2.G7 U2.G8 U2.G9 U2.G10 U2.G12 U2.G14 U2.H1 U2.H7 U2.H9 U2.H11 U2.H21 U2.J8 U2.J10 U2.J12 U2.J18 U2.K5 U2.K7 U2.K9 U2.K11 U2.K15 U2.L2 U2.L8 U2.L9 U2.L22 U2.M7 U2.M11 U2.M19 U2.N6 U2.N8 U2.N16 U2.P3 U2.P7 U2.P9 U2.P11 U2.P13 U2.R8 U2.R10 U2.R12 U2.R20 U2.T7 U2.T9 U2.T11 U2.T17 U2.U4 U2.U14 U2.V1 U2.V11 U2.V21 U2.W8 U2.W18 U2.Y5 U2.Y15
Vccbram: *.14 *.21 *.23 C7.2 C8.2 C9.2 C10.2 C11.2 C12.2 C13.2 C14.2 C15.2 C25.2 C26.2 TP6.1 U2.D6 U2.D10 U2.E8 U2.F7 U2.F9 U2.H8 U2.H10 U2.J7 U2.J9 U2.J11 U2.K8 U2.L7 U2.L11 U2.M8 U2.N7 U2.N11 U2.P8 U2.P10 U2.R7 U2.R9 U2.T8 U2.T10
Vcco: *.20 C27.2 C28.2 C29.2 C30.2 C31.2 C32.2 C33.2 C34.2 C35.2 C36.2 C37.2 C38.2 C39.2 C40.2 P1.1 P2.1 P3.1 Q1.1 Q1.4 TP5.1 U2.A17 U2.AA7 U2.AA17 U2.AB4 U2.AB14 U2.B14 U2.C1 U2.C21 U2.D18 U2.E15 U2.F2 U2.F12 U2.F22 U2.G19 U2.H6 U2.H16 U2.J3 U2.J13 U2.K20 U2.L17 U2.M4 U2.M14 U2.N1 U2.N21 U2.P18 U2.R5 U2.R15 U2.T2 U2.T12 U2.T22 U2.U19 U2.V6 U2.V16 U2.W3 U2.W13 U2.Y10 U2.Y20
Vmgtavcc: *.16 TP8.1 U2.B5 U2.B7 U2.B9 U2.B11 U2.C4 U2.C8
VN: *.132 U2.M9
VP: *.133 U2.L10
Vrefp: *.12 TP7.1 U2.M10
WE: *.174 U2.H19
WE_NAND: U2.AA16
WP: U2.AB16
pads on no net: *.NC P5.1 P5.3 TP2.1 TP3.1 TP4.1 U2.A4 U2.A6 U2.A8 U2.A10 U2.B4 U2.B6 U2.B8 U2.B10 U2.C5 U2.C7 U2.C9 U2.C11 U2.D5 U2.D7 U2.D9 U2.D11 U2.E6 U2.E10 U2.F6 U2.F8 U2.F10

## Polygon pours and split planes (outlines as drawn)
no net on Top Layer 1 (split plane): 6979.9,1020.1 1020.1,1020.1 1020.1,4979.9 6979.9,4979.9
no net on Bottom Layer 1 (split plane): 6979.9,1020.1 1020.1,1020.1 1020.1,4979.9 6979.9,4979.9